# Altium PCB BQ2057.PcbDoc
Units mm, origin at the board's own origin, x right, y up, seen from the top; angles counter-clockwise.
Board outline 25.4 x 15.88 mm, 2 copper layers (Top Layer, Bottom Layer); 12 components, 11 nets, 32 pads, 3 vias.
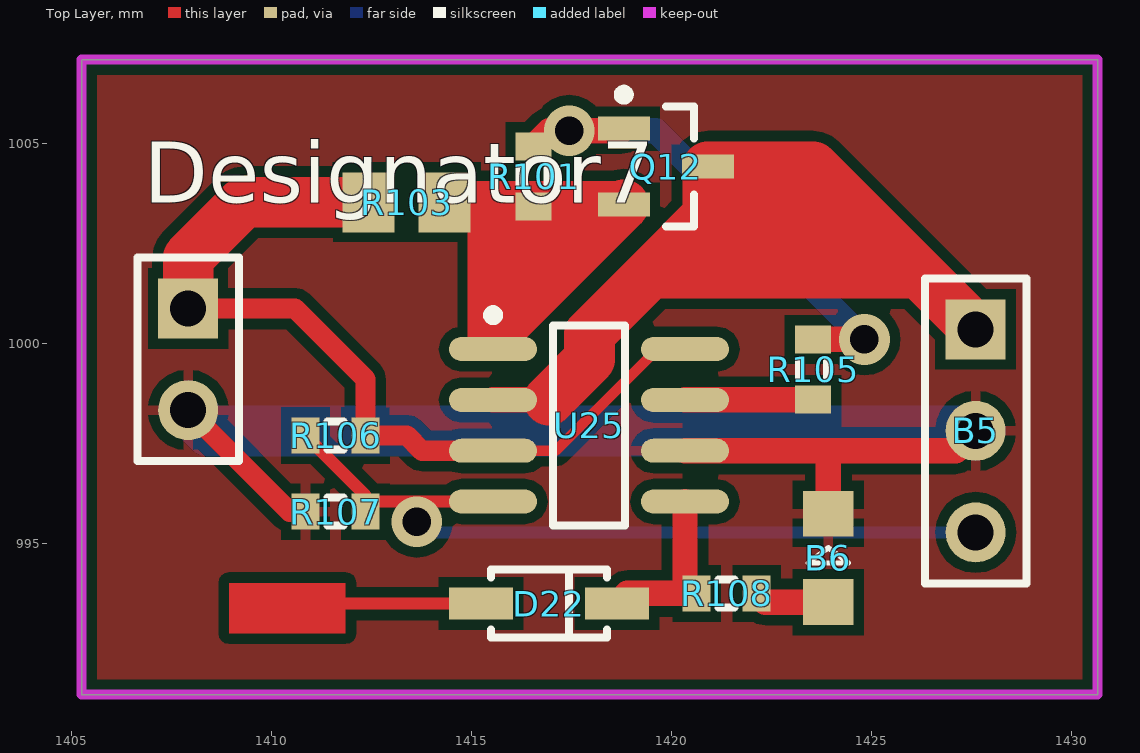
[diagram p0: Top Layer view]
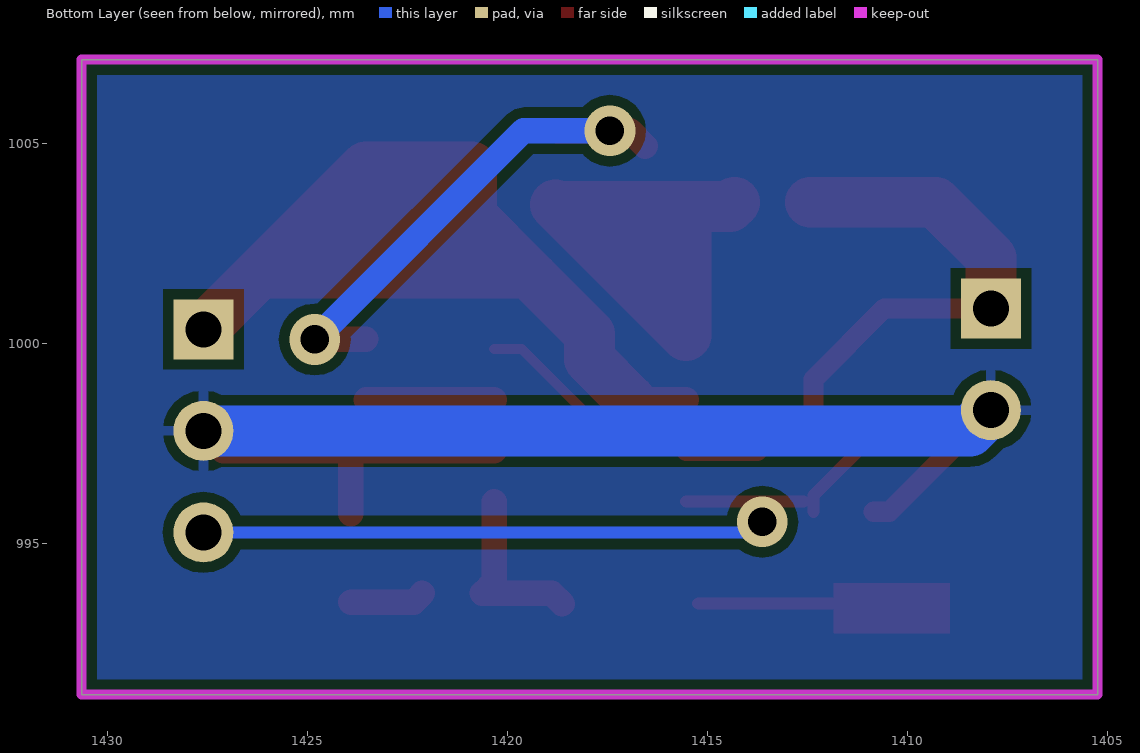
[diagram p1: Bottom Layer view, seen from below]
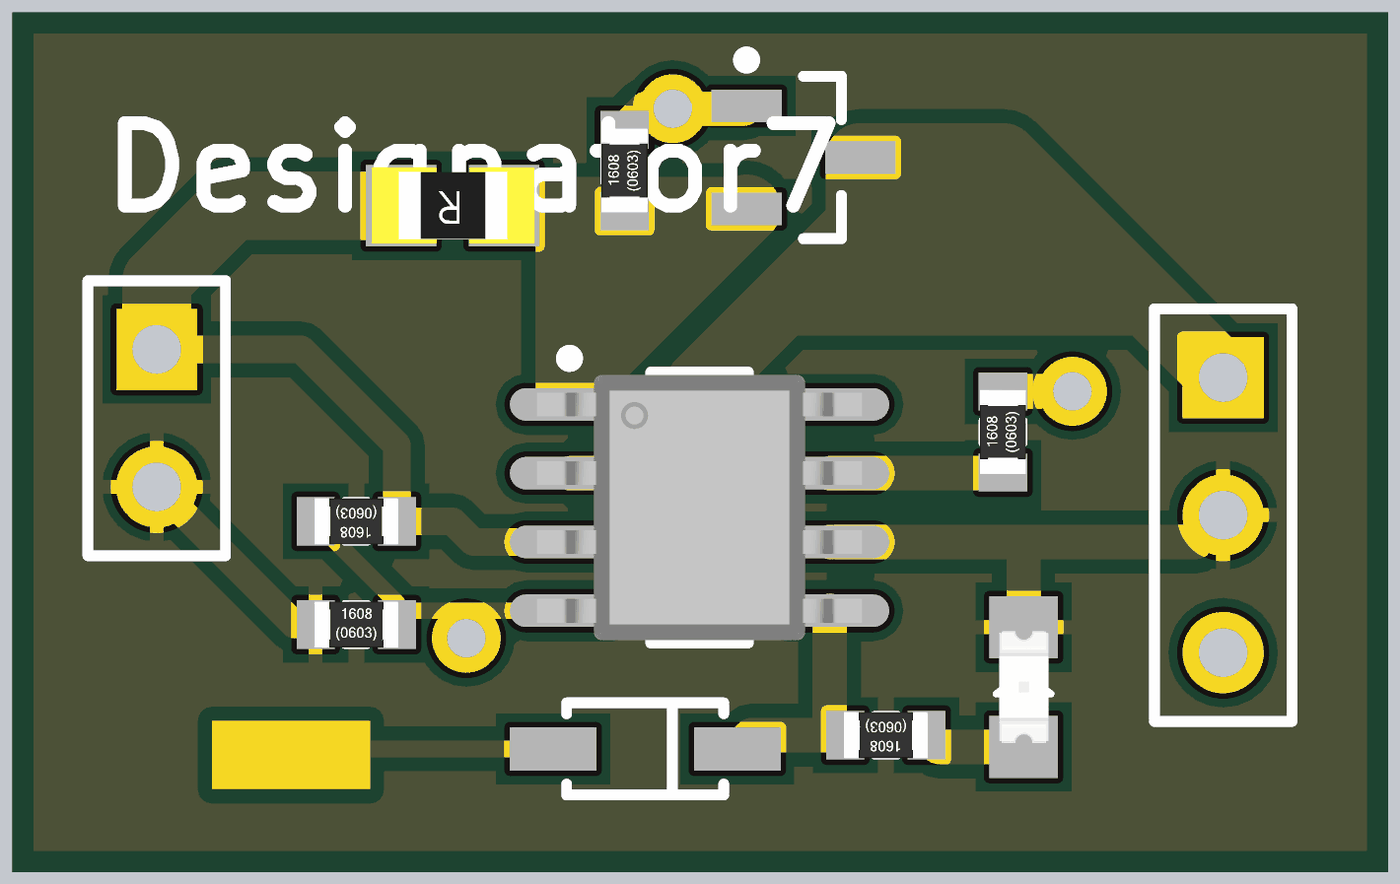
[diagram p2: 3D render of the assembled board from above, using the file's embedded part models]

## Layer stack, top to bottom
Top Layer: signal copper 0.0356
Dielectric: dielectric 0.32, FR-4, Dk 4.8
Bottom Layer: signal copper 0.0356

## Board outline
1405.255,991.235 1430.655,991.235 1430.655,1007.11 1405.255,1007.11

## Design rules (kind name [scope] priority, off if disabled: settings)
Clearance [All] p1: gap=0.254
PolygonConnect [All] p1: connectstyle=Relief reliefconductorwidth=0.254 reliefentries=4 polygonreliefangle="90 Angle"
RoomDefinition BQ2057_锂电池充电 [InComponentClass('BQ2057_锂电池充电')] p1: confinementstyle=ConfineIn formatcopy=TRUE outline 1364.869,967.74 1459.344,967.74 1459.344,1032.891 1364.869,1032.891
RoutingVias [All] p1: holewidth=0.254 width=0.508 viastyle="Through Hole" minholewidth=0.711 minwidth=1.27 maxholewidth=0.711 maxwidth=1.27
SilkscreenOverComponentPads [All] p1: minsilkscreentomaskgap=0.254
SolderMaskExpansion [All] p1: expansion=0.102
Width [All] p1: maxlimit=2.54 minlimit=0.254 preferedwidth=0.254
27 further rules are at their usual default settings.

## Classes and differential pairs
component class BQ2057_锂电池充电: B5 B6 D22 Q12 R101 R103 R105 R106 R107 R108 U25

## Components (designator, comment, footprint, x,y, rotation, side; value= is the part's Value field where it differs from the comment)
B5 "18AQ220-01" HDR1X3 1427.607,1000.367 r270 top
B6 "GREEN" LED0805 1423.924,994.652 r90 top
D22 "IN4148W" SOD123 1416.939,993.509 r0 top
Designator7 "Comment" HDR1X2 1407.922,1000.887 r270 top
Q12 "AO3415" SOT23_N 1419.86,1004.431 r0 top
R101 "10K" 0603R 1416.558,1004.189 r90 top
R103 "0R047" 2012[0805] 1413.383,1003.542 r180 top
R105 "0R" 0603R 1423.543,999.363 r90 top
R106 "1M" 0603R 1411.605,997.712 r180 top
R107 "1M" 0603R 1411.605,995.807 r0 top
R108 "10K" 0603R 1421.384,993.763 r180 top
U25 "BQ2057" SOIC8_N 1417.942,997.966 r0 top

## Footprints (in the part's own frame and the unit in brackets; to place one, negate y for a bottom-side part, rotate by r counter-clockwise, add the part's x,y. Pads: shape width x height; smd on the part's side, far side on the other; paste and mask are expansions set on the pad)
0603R [mm]
  rect 0.7x0.9 smd: 1(-0.75,0) 2(0.75,0)
  silkscreen extent -0.2,-0.35 0.2,0.35, body extent -0.77,-0.42 0.78,0.43, height 0.45
2012[0805] [mm]
  rect 1.3x1.5 smd: 1(-0.95,0) 2(0.95,0)
  body extent -1.51,-0.7 1.49,0.7, height 0.53
HDR1X2 [mm] "Connector; Header; 2 Position"
  rect 1.5x1.5 hole 0.9: 1(0,0)
  round 1.5 hole 0.9: 2(2.54,0)
  silkscreen extent -1.27,-1.27 3.81,1.27
HDR1X3 [mm] "Connector; Header; 3 P"
  rect 1.5x1.5 hole 0.9: 1(0,0)
  round 1.5 hole 0.9: 2(2.54,0) 3(5.08,0)
  silkscreen extent -1.27,-1.27 6.35,1.27
LED0805 [mm]
  rect 1.143x1.27 smd: 1(-1.105,0) 2(1.105,0)
  silkscreen extent -0.13,-0.51 0.25,0.51, body extent -1.03,-0.46 1.03,0.45, height 0.85
SOD123 [mm] "SOD-123; 2 Leads; Body 2.7 x 1.6 mm, ("
  rect 1.6x0.8 smd: 1(-1.7,0) 2(1.7,0)
  silkscreen extent -1.45,-0.85 1.45,0.85
SOIC8_N [mm] "SOIC, 8-Leads, Body 4.9x3.9mm, Pitch 1.27mm, IPC Medium"
  oval 2.2x0.6 smd: 1(-2.4,1.905) 2(-2.4,0.635) 3(-2.4,-0.635) 4(-2.4,-1.905) 5(2.4,-1.905) 6(2.4,-0.635) 7(2.4,0.635) 8(2.4,1.905)
  silkscreen extent -2.52,-2.5 0.9,2.88, body extent -3,-2.45 3,2.45, height 1.7
SOT23_N [mm] "SOT23, 3-Leads, Body 2.9x1.3mm, Pitch 0.95mm, Lead Span 2.3mm, IPC Medium Den"
  rect 1.3x0.6 smd: 1(-1.05,0.95) 2(-1.05,-0.95) 3(1.05,0)
  silkscreen extent -1.17,-1.5 0.7,1.92, body extent -0.7,-1.5 0.7,1.5, height 1.1

## Part data
B5: library part BATTERY, "锂电池"
B6: library part LED
D22: library part DIODE, "DIODE"
Q12: library part BSH205, "P-channel Enhancement Mode MOSFET"
R101 R103 R105 R106 R107 R108: library part RES
U25: "集成电路"

## Via types
v1: diameter 1.27, hole 0.711, Top Layer to Bottom Layer, 3 vias

## Nets (pads, with @x,y where several pads share a name; then routed paths per layer and width w, separated by ;. In a path a pad name is that pad's centre, name@x,y a point inside that pad or via, vN(x,y) a via of type N, cw(c..) or ccw(c..) an arc to the next point about the centre after c; other vN are vias at no path point)
BAT: B5.1 Q12.3 U25.2 | length 23.6
  Top Layer w0.635: U25.2 1416.939,998.601
  Top Layer w1.27: 1416.939,998.601 1417.955,999.617 1417.955,1000.252 1419.352,1001.649 ; 1425.968,1001.776 1419.479,1001.776 1420.91,1003.207 Q12.3 1423.543,1004.431 B5.1
CHR: D22.1 | length 4.2
  Top Layer w0.305: 1411.085,993.509 D22.1
GGND: B5.2 B6.2 Designator7.2 R107.1 U25.6 | length 32.7
  Top Layer w0.508: Designator7.2 1410.462,995.807 R107.1
  Top Layer w0.635: U25.6 1427.111,997.331 B5.2 ; B6.2 1423.924,997.077
  Bottom Layer w1.27: Designator7.2 1408.442,997.827 B5.2
NetB6_1: B6.1 R108.1 | length 1.9
  Top Layer w0.635: R108.1 1422.35,993.547 B6.1
NetD22_2: D22.2 R108.2 U25.5 | length 4.5
  Top Layer w0.635: D22.2 1418.893,993.763 R108.2 1420.342,994.055 U25.5
NetQ12_1: Q12.1 R101.2 R105.2 | length 13.2
  Top Layer w0.635: R101.2 1416.951,1005.332 v1(1417.447,1005.332) Q12.1@1418.761,1005.332 ; R105.2 v1(1424.825,1000.113)
  Bottom Layer w0.635: v1(1417.447,1005.332) 1419.606,1005.332 v1(1424.825,1000.113)
NetR105_1: R105.1 U25.7 | length 3.2
  Top Layer w0.635: U25.7 R105.1@1423.543,998.601
NetR106_2: B5.3 R106.2 R107.2 U25.4 | length 19.5
  Top Layer w0.305: R106.2 1412.355,996.212 R107.2 ; R107.2@1412.609,996.061 U25.4
  Bottom Layer w0.305: v1(1413.637,995.553) 1413.903,995.287 B5.3
P6_4: 
SNS: Q12.2 R101.1 R103.1 U25.1 | length 12.3
  Top Layer w1.27: R103.1 1414.441,1003.434 Q12.2@1418.763,1003.434 ; 1415.542,1003.434 1415.542,1000.213 Q12.2@1418.763,1003.434 ; Q12.2 Q12.2@1418.763,1003.434
VCC5V: Designator7.1 R103.2 R106.1 U25.3 U25.8 | length 22.1
  Top Layer w0.254: U25.3 1417.106,997.331 1419.646,999.871 U25.8
  Top Layer w0.508: Designator7.1 1410.589,1000.887 1412.355,999.121 R106.1 1413.383,997.712 1413.764,997.331 U25.3
  Top Layer w1.27: Designator7.1 1407.922,1002.157 1409.307,1003.542 R103.2

## Polygon pours and split planes (outlines as drawn)
GGND on Top Layer "Top Layer-No Net" (solid, pour order 2): 1405.255,1007.11 1405.255,991.362 1430.528,991.362 1430.655,991.235 1430.655,1007.11
GGND on Bottom Layer "Top Layer-No Net" (solid, pour order 4): 1405.255,1007.11 1405.255,991.235 1405.382,991.362 1430.655,991.362 1430.655,1007.11

## Keep-outs
Keep-Out Layer:
  the board outline again, w0.254

## Other copper
Top Layer:
  rectangle net CHR: 1408.938,992.759 1411.859,994.029
  rectangle net SNS: 1416.05,1001.522 1417.32,1003.046
  rectangle net BAT: 1420.749,1001.649 1424.813,1004.062

## Silkscreen, mask and mechanical layers (free items; w line width, h text height)
Top Solder:
  rectangle: 1408.938,992.771 1411.859,994.041